# EAGLE board side panel V5 (EAGLE 8.3.1)
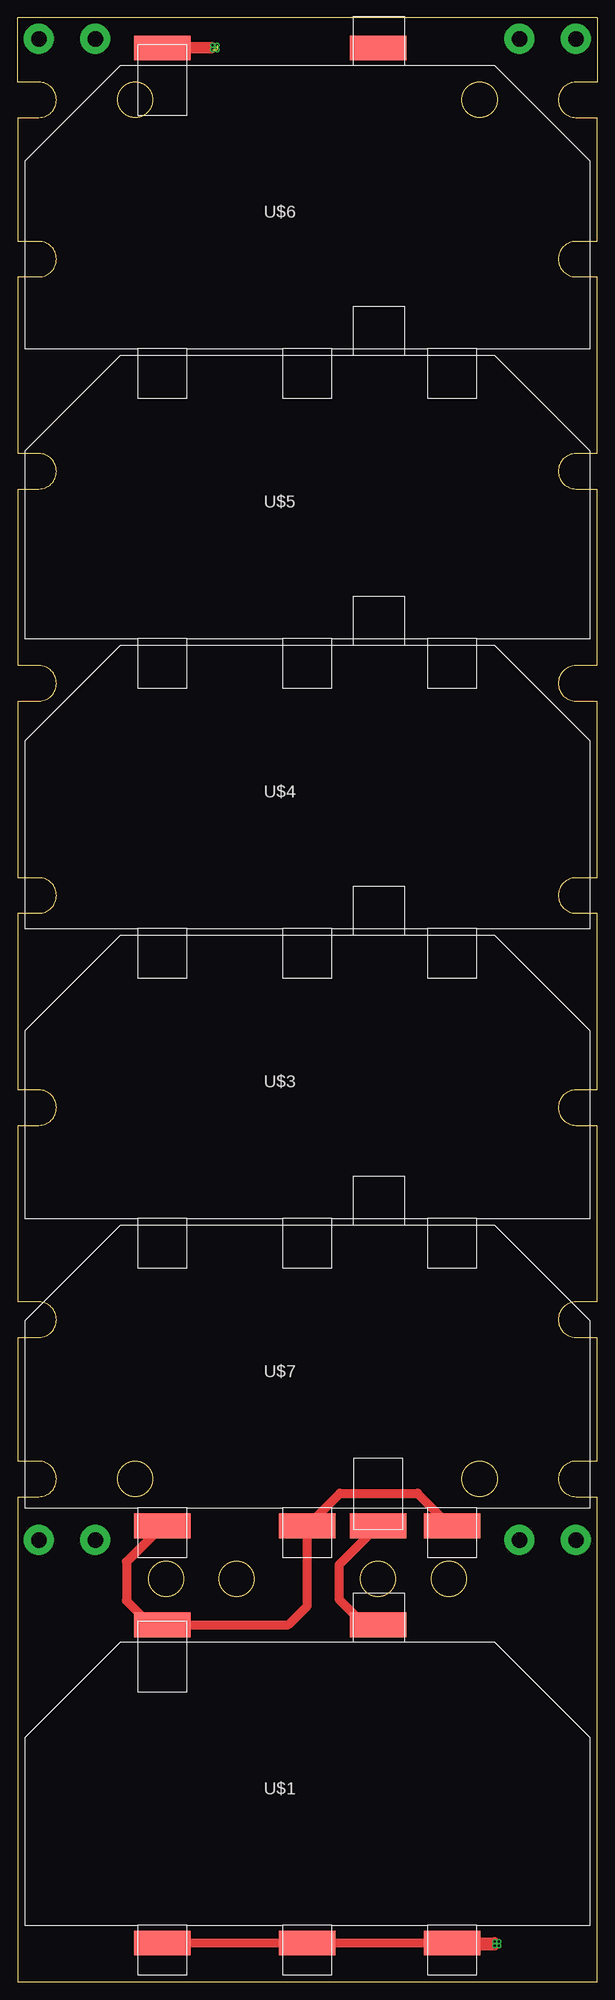
[diagram p0: board, top side]
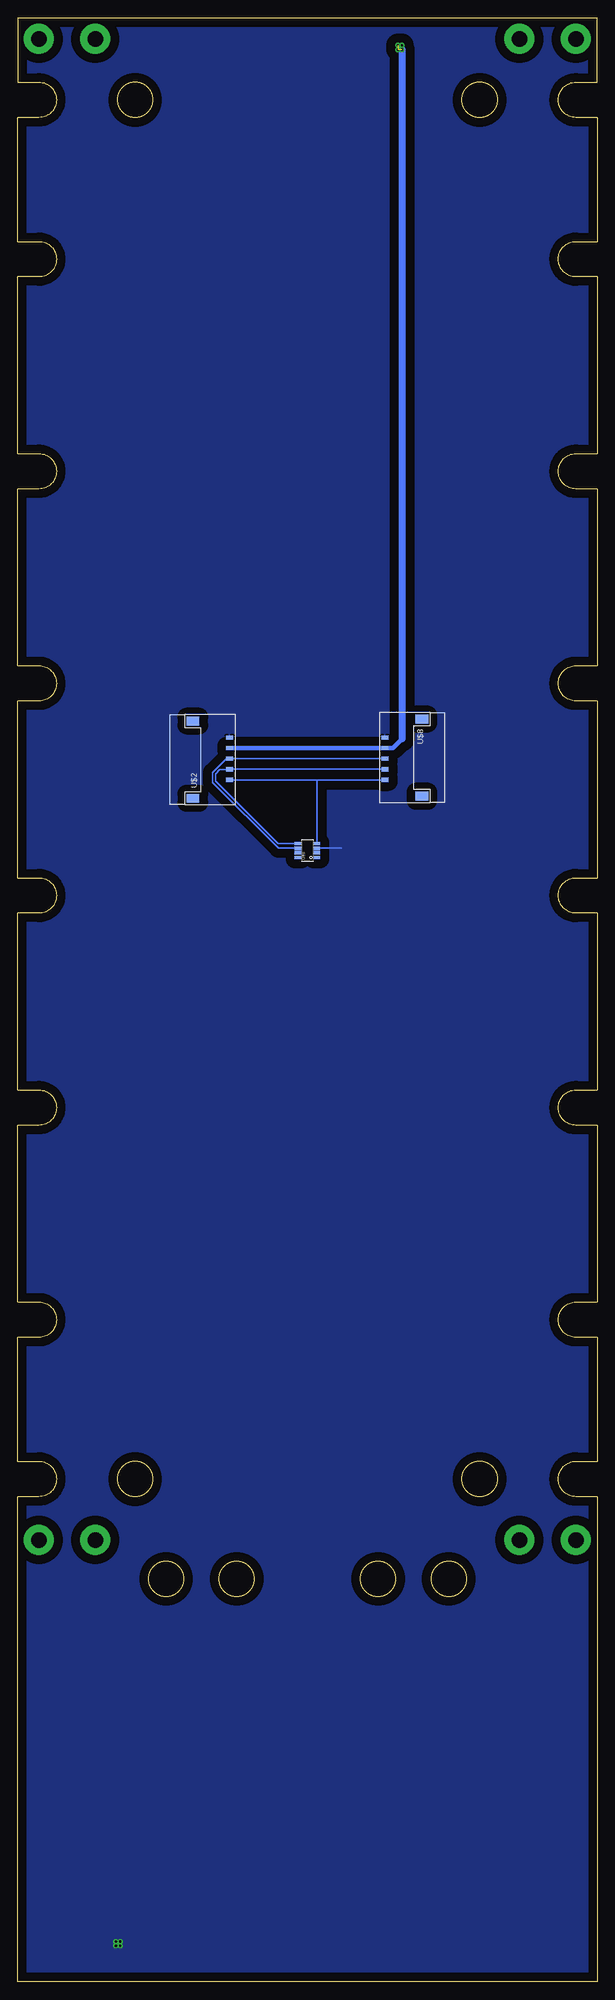
[diagram p1: board, bottom side, seen from below]

Size 82 x 277.8 mm. Coordinates in mm from the lower left corner, seen from the top.
Outline: 0,268.68 0,277.8 82,277.8 82,268.68 79,268.68 arc180 79,263.68 82,263.68 82,246.15 79,246.15 arc180 79,241.15 82,241.15 82,216.15 79,216.15 arc180 79,211.15 82,211.15 82,186.15 79,186.15 arc180 79,181.15 82,181.15 82,156.15 79,156.15 arc180 79,151.15 82,151.15 82,126.15 79,126.15 arc180 79,121.15 82,121.15 82,96.15 79,96.15 arc180 79,91.15 82,91.15 82,73.62 79,73.62 arc180 79,68.62 82,68.62 82,0 0,0 0,68.62 3,68.62 arc180 3,73.62 0,73.62 0,91.15 3,91.15 arc180 3,96.15 0,96.15 0,121.15 3,121.15 arc180 3,126.15 0,126.15 0,151.15 3,151.15 arc180 3,156.15 0,156.15 0,181.15 3,181.15 arc180 3,186.15 0,186.15 0,211.15 3,211.15 arc180 3,216.15 0,216.15 0,241.15 3,241.15 arc180 3,246.15 0,246.15 0,263.68 3,263.68 arc180 3,268.68 0,268.68
Outline: circle at 61,57 radius 2.5
Outline: circle at 31,57 radius 2.5
Outline: circle at 16.62,71.12 radius 2.5
Outline: circle at 21,57 radius 2.5
Outline: circle at 51,57 radius 2.5
Outline: circle at 65.38,266.18 radius 2.5
Outline: circle at 65.38,71.12 radius 2.5
Outline: circle at 16.62,266.18 radius 2.5
Copper layers (1*16): Top 0.035mm / dielectric 1.5mm / Bottom 0.035mm
Design rules "default": minimum track width 10mil, minimum drill 24mil, track to track 8mil, track to pad 8mil, pad to pad 8mil, via to via 8mil, smd to smd 8mil, copper to edge 40mil, drill to drill 8mil, minimum pad ring 10mil, minimum via ring 8mil, stop-mask expansion 4mil, vias tented up to drill 0mil, thermal gap 10mil

## Footprints (pad centres in the part's own frame; a part is rotated, then mirrored left to right if it is on the bottom)
SOLAR_CELL_STAND-ALONE = smd 8 x 3.5: P$1 19.5,-2.5; P$2 40,-2.5; P$3 60.5,-2.5; P$4 50,42.5; P$5 19.5,42.5
PICOLOCK_5 = smd 1.25 x 1.8: MNT@1 -2.605,5.2; MNT@2 8.305,5.2 | smd 0.6 x 1: P$1 0,0; P$2 1.5,0; P$3 3,0; P$4 4.5,0; P$5 6,0
SOLAR_CELL_TOP_SHORT-PAD = smd 8 x 3.5: P$1 50,42.5; P$2 19.5,42.5
SOLAR_CELL_BOTTOM+BYPASS = smd 8 x 3.5: P$1 19.5,-2.5; P$2 40,-2.5; P$3 60.5,-2.5; P$4 50,-2.5
S008 = smd 0.45 x 1: 1 -0.975,-1.3; 2 -0.325,-1.3; 3 0.325,-1.3; 4 0.975,-1.3; 5 0.975,1.3; 6 0.325,1.3; 7 -0.325,1.3; 8 -0.975,1.3

## Placement (x,y rotation side)
U$1  SOLAR_CELL_STAND-ALONE  [SOLAR_CELL_STAND-ALONE]  1,8 0 top
U$2  PICOLOCK_5  [PICOLOCK_5]  52,170 90 bottom
U$3  SOALAR_CELL_OUTLINE  [SOLAR_CELL_OUTLINE]  1,108 0 top
U$4  SOALAR_CELL_OUTLINE  [SOLAR_CELL_OUTLINE]  1,149 0 top
U$5  SOALAR_CELL_OUTLINE  [SOLAR_CELL_OUTLINE]  1,190 0 top
U$6  SOLAR_CELL_TOP  [SOLAR_CELL_TOP_SHORT-PAD]  1,231 0 top
U$7  SOLAR_CELL_BOTTOM+BYPASS  [SOLAR_CELL_BOTTOM+BYPASS]  1,67 0 top
U$8  PICOLOCK_5  [PICOLOCK_5]  30,176 270 bottom
U$9  INA219  [S008]  41,160 90 bottom

## Library data of the parts
U$1-U$9 = DubSat1 Components

## Nets
GND: U$1.P$1 U$1.P$2 U$1.P$3 U$2.P$5 U$8.P$1 U$9.3
N$9: U$1.P$4 U$7.P$4
N$10: U$1.P$5 U$7.P$1 U$7.P$2 U$7.P$3
POWER: U$2.P$4 U$6.P$2 U$8.P$2
SCL: U$2.P$2 U$8.P$4 U$9.5
SDA: U$2.P$3 U$8.P$3 U$9.6
VS: U$2.P$1 U$8.P$5 U$9.4

## Tracks (layer width: path | path; a pad name or v marks a point on that pad's centre or on a via)
GND  (via drill 0.3)
  Top 1.27: U$1.P$1 U$1.P$2 U$1.P$3 | U$1.P$3 61.7,5.7 v67.5,5.7 | U$1.P$3 61.9,5.1 v67.5,5.1
  Bottom 0.2: U$9.3 39.67,160.35 36.15,160.35
  other vias: 68.1,5.7 68.1,5.1
  pour Bottom (isolate 1.27): 0,0 0,277.8 82,277.8 82,0
N$1  (via drill 2.2 pad 4.24)
  other vias: 3,274.8
N$2  (via drill 2.2 pad 4.24)
  other vias: 11,274.8
N$3  (via drill 2.2 pad 4.24)
  other vias: 3,62.5
N$4  (via drill 2.2 pad 4.24)
  other vias: 11,62.5
N$5  (via drill 2.2 pad 4.24)
  other vias: 79,274.8
N$6  (via drill 2.2 pad 4.24)
  other vias: 71,274.8
N$7  (via drill 2.2 pad 4.24)
  other vias: 79,62.5
N$8  (via drill 2.2 pad 4.24)
  other vias: 71,62.5
N$9
  Top 1.27: U$7.P$4 45.5,59 45.5,54.1 49.1,50.5 U$1.P$4
N$10
  Top 1.27: U$7.P$1 15.4,59.4 15.4,53.9 18.8,50.5 U$1.P$5 38.3,50.5 41,53.2 41,63.8 40.7,64.1 40.7,64.2 U$7.P$2 45.6,69.1 56.6,69.1 61.2,64.5 U$7.P$3
POWER  (via drill 0.3)  (2 unrouted)
  Top 1.016: v27.6,273.9 20.9,273.9 U$6.P$2 20.7,273.3 v27.6,273.3
  Bottom 0.61: 27.6,175.8 28.9,174.5 U$8.P$2 U$2.P$4
  Bottom 1.016: v27.6,273.3 27.6,175.8
  other vias: 28.2,273.3 28.2,273.9
SCL
  Bottom 0.2: U$8.P$4 U$2.P$2 52.05,171.45 53.4,171.45 54,170.85 54,169.8 45.17,160.97 U$9.5
SDA
  Bottom 0.2: U$8.P$3 U$2.P$3 52.42,173 54.4,171.02 54.4,169.63 45.09,160.32 U$9.6
VS
  Bottom 0.2: 39.63,170 U$8.P$5 | 39.63,170 U$2.P$1 | U$9.4 39.63,161.04 39.63,170